# Altium PCB 1PR.PcbDoc
Units mil, origin at the board's own origin, x right, y up, seen from the top; angles counter-clockwise.
Board outline 6000 x 4000 mil, 2 copper layers (Top Layer, Bottom Layer); 24 components, 26 nets, 98 pads, 0 vias.
Unrouted connection lines stored in the file: 62.
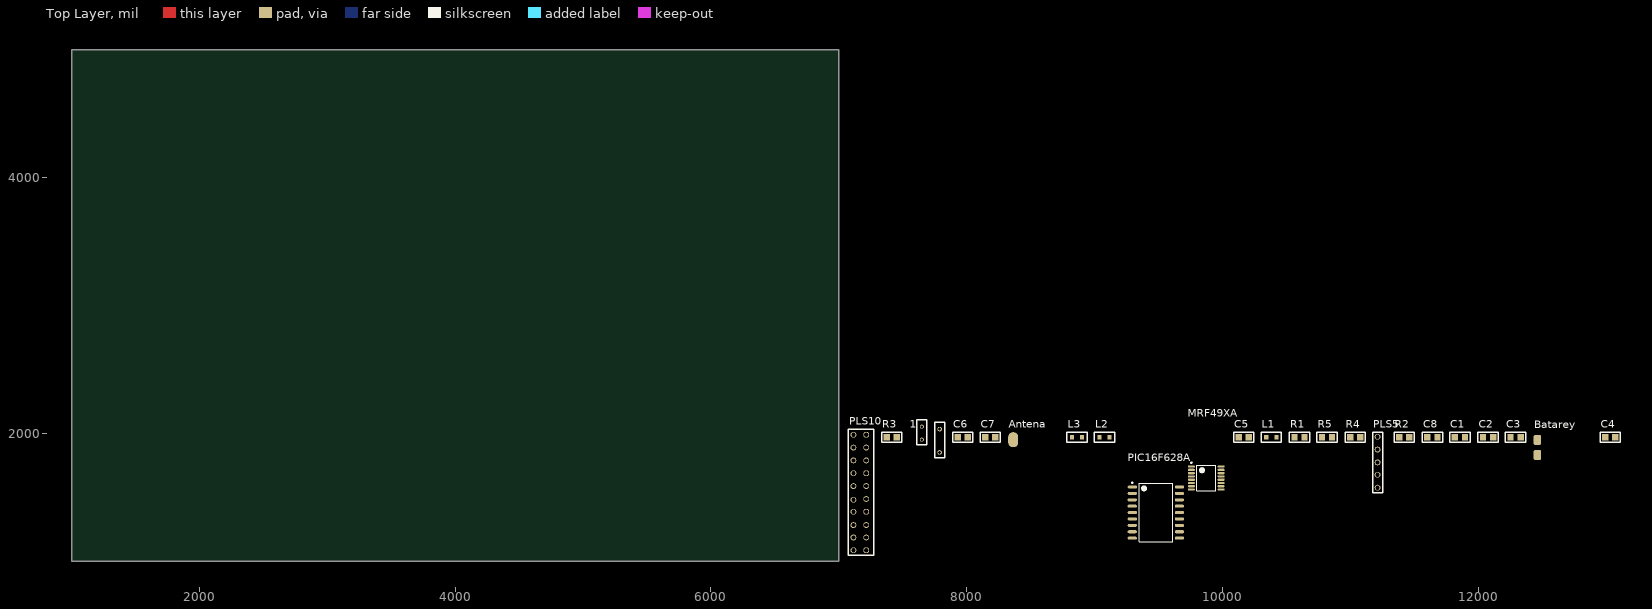
[diagram p0: Top Layer view]
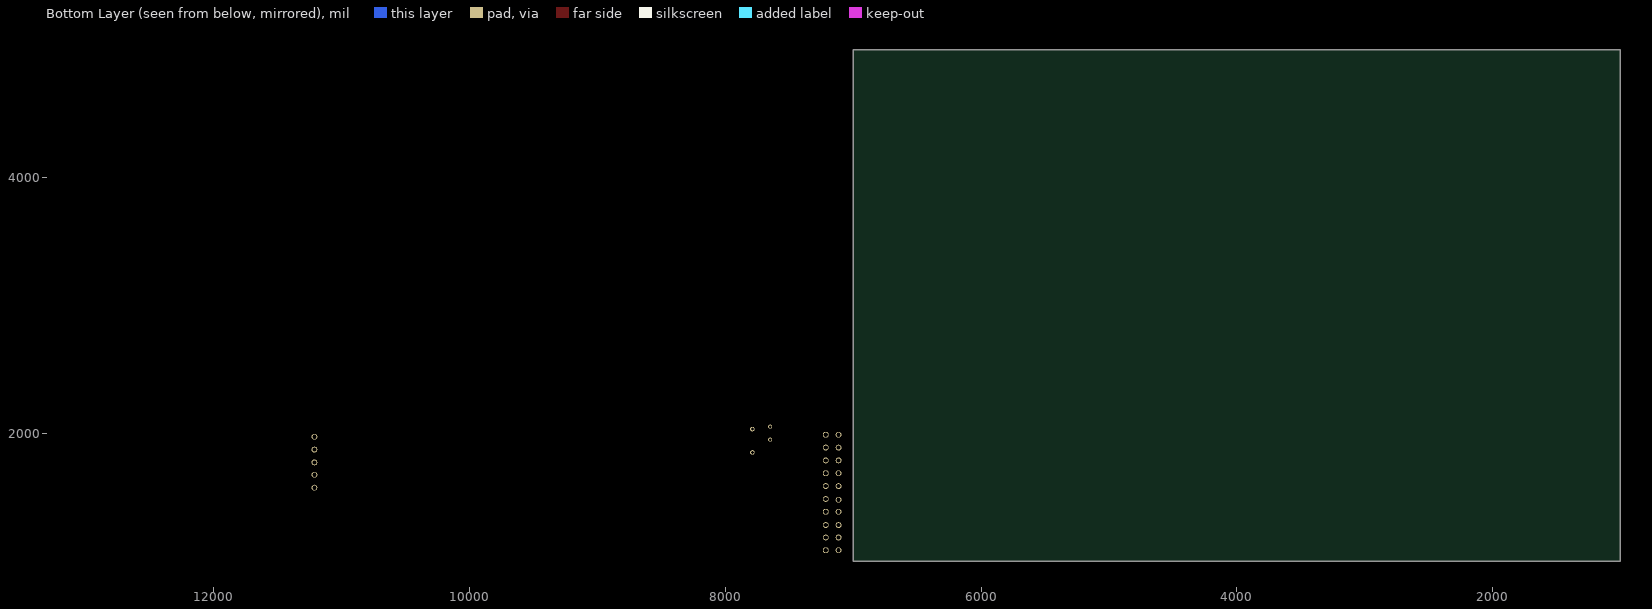
[diagram p1: Bottom Layer view, seen from below]

## Layer stack, top to bottom
Top Solder: solder mask 0.4, Solder Resist, Dk 3.5
Top Layer: signal copper 1.4
Dielectric 1: dielectric 12.6, FR-4, Dk 4.8
Bottom Layer: signal copper 1.4
Bottom Solder: solder mask 0.4, Solder Resist, Dk 3.5

## Board outline
1000,1000 7000,1000 7000,5000 1000,5000

## Design rules (kind name [scope] priority, off if disabled: settings)
Clearance [All] p1: gap=10
PolygonConnect [All] p1: connectstyle=Relief reliefconductorwidth=10 reliefentries=4 polygonreliefangle="90 Angle" airgapwidth=10
RoutingVias [All] p1: holewidth=28 width=50 viastyle="Through Hole" minholewidth=28 minwidth=50 maxholewidth=28 maxwidth=50
SolderMaskExpansion [All] p1: expansion=4
Width [All] p1: maxlimit=10 minlimit=10 preferedwidth=10
30 further rules are at their usual default settings.

## Components (designator, comment, footprint, x,y, rotation, side; value= is the part's Value field where it differs from the comment)
1 "" "Light-emitting diode" 7649.06,1950 r90 top
Antena "Antena" Anteny 8364.06,1950 r90 top (schematic designator Antena?)
Batarey "Batarey" Batarey 12464.06,1830 r90 top (schematic designator Batarey?)
C1 "" Ñ0805 11819.06,1970 r0 top
C2 "" Ñ0805 12039.06,1970 r0 top
C3 "" Ñ0805 12254.06,1970 r0 top
C4 "" Ñ0805 12994.06,1970 r0 top
C5 "" Ñ0805 10129.06,1970 r0 top
C6 "" Ñ0805 7929.06,1970 r0 top
C7 "" Ñ0805 8144.06,1970 r0 top
C8 "" Ñ0805 11604.06,1970 r0 top
L1 "" L? 10344.06,1970 r0 top
L2 "" L? 9039.06,1970 r0 top
L3 "" L? 8824.06,1970 r0 top
MRF49XA "MRF49XA" MRF49XA 9874.06,1650 r0 top (schematic designator MRF?)
PIC16F628A "PIC16F627A" PIC16F627A 9480,1380 r0 top (schematic designator PIC?)
PLS5 "PLS5" PLS5 11214.06,1575 r90 top (schematic designator *?)
PLS10 "PLS10" PLS10 7114.06,1085 r90 top (schematic designator *)
R1 "" R0805 10564.06,1970 r0 top
R2 "" R0805 11384.06,1970 r0 top
R3 "" R0805 7374.06,1970 r0 top
R4 "" R0805 10999.06,1970 r0 top
R5 "" R0805 10779.06,1970 r0 top
? "Y1" Quartz 7789.06,1850 r90 top

## Footprints (in the part's own frame and the unit in brackets; to place one, negate y for a bottom-side part, rotate by r counter-clockwise, add the part's x,y. Pads: shape width x height; smd on the part's side, far side on the other; paste and mask are expansions set on the pad)
Anteny [mm]
  oval 3x2 smd: 1(0,0)
Batarey [mm]
  rrect50% 2x1.524 smd: 1(0,0) 2(3,0)
L? [mm]
  rect 0.85x0.85 smd: 1(0,0) 2(2,0)
  silkscreen extent -1,-1 3,1
"Light-emitting diode" [mm]
  round 0.8 hole 0.5: 1(0,0) 2(2.6,0)
  silkscreen extent -1,-1 4,1
MRF49XA [mm]
  oval 1.4x0.45 smd: 1(-2.95,2.275) 2(-2.95,1.625) 3(-2.95,0.975) 4(-2.95,0.325) 5(-2.95,-0.325) 6(-2.95,-0.975) 7(-2.95,-1.625) 8(-2.95,-2.275) 9(2.95,-2.275) 10(2.95,-1.625) 11(2.95,-0.975) 12(2.95,-0.325) 13(2.95,0.325) 14(2.95,0.975) 15(2.95,1.625) 16(2.95,2.275)
  silkscreen extent -3.07,-2.55 1.85,3.17, body extent -2.25,-2.55 2.25,2.55, height 1.2
PIC16F627A [mm]
  oval 1.85x0.6 smd: 1(-4.675,5.08) 2(-4.675,3.81) 3(-4.675,2.54) 4(-4.675,1.27) 5(-4.675,0) 6(-4.675,-1.27) 7(-4.675,-2.54) 8(-4.675,-3.81) 9(-4.675,-5.08) 10(4.675,-5.08) 11(4.675,-3.81) 12(4.675,-2.54) 13(4.675,-1.27) 14(4.675,0) 15(4.675,1.27) 16(4.675,2.54) 17(4.675,3.81) 18(4.675,5.08)
  silkscreen extent -4.8,-5.8 3.35,6.05, body extent -3.75,-5.8 3.75,5.8, height 2.05
PLS5 [mm]
  round 1.15 hole 0.85: 1(0,0) 2(2.55,0) 3(5.01,0) 4(7.56,0) 5(10.11,0)
  silkscreen extent -1,-1 11,1
PLS10 [mm]
  round 1.15 hole 0.85: 1(0,0) 2(2.55,0) 3(5.01,0) 4(7.65,0) 5(10.02,0) 6(12.75,0) 7(15.3,0) 8(17.85,0) 9(20.4,0) 10(22.95,0) 11(0,-2.55) 12(2.55,-2.55) 13(5.01,-2.55) 14(7.65,-2.55) 15(10.2,-2.55) 16(12.75,-2.55) 17(15.3,-2.55) 18(17.85,-2.55) 19(20.4,-2.55) 20(22.95,-2.55)
  silkscreen extent -1,-4 24,1
Quartz [mm]
  round 0.9 hole 0.6: 1(0,0) 2(4.65,0)
  silkscreen extent -1,-1 6,1
R0805 [mm]
  rect 1.27x1.27 smd: 1(0,0) 2(2,0)
  silkscreen extent -1,-1 3,1
Ñ0805 [mm]
  rect 1.27x1.27 smd: 1(0,0) 2(2,0)
  silkscreen extent -1,-1 3,1

## Part data
1: library part "Light-emitting diode"
C1 C2 C3 C4 C5 C6 C7 C8: library part Capacity
L1 L2 L3: library part Inductance
R1 R2 R3 R4 R5: library part Rezistor
?: library part Quartz

## Nets (pads, with @x,y where several pads share a name; then routed paths per layer and width w, separated by ;. In a path a pad name is that pad's centre, name@x,y a point inside that pad or via, vN(x,y) a via of type N, cw(c..) or ccw(c..) an arc to the next point about the centre after c; other vN are vias at no path point)
CS: MRF49XA.3 PIC16F628A.17
FSK/DATA/FSEL: MRF49XA.6 PIC16F628A.18
"MCLR VPP": C8.1 R4.1
Net1_1: 1.1 R3.2
Net1_2: 1.2 PIC16F628A.16
Net*?_1: PLS5.1 R4.2
Net*?_2: PLS5.2 R5.2
Net*_10: PIC16F628A.15 PLS10.10 R2.1
Net_2: ?.2 MRF49XA.9
NetAntena?_1: Antena.1 C7.2
NetC5_1: C5.1 L1.2 L2.1 L3.1 MRF49XA.13
NetC6_1: C6.1 L2.2 MRF49XA.12
NetC6_2: C6.2 C7.1 L3.2
NETLABEL87: PIC16F628A.4 PLS10.1 R1.1
RB0/INT: PIC16F628A.6 PLS10.2
RB1/RX/DT: PIC16F628A.7 PLS10.3
RB2/TC/CK: PIC16F628A.8
RB3/CCP1: PIC16F628A.9 PLS10.5
RB4/PGM: PIC16F628A.10 PLS10.6
RB5: PIC16F628A.11 PLS10.7
RB6/T1OSO/T1CKI/PGC: PIC16F628A.12 PLS5.5 PLS10.8
RB7/T1OSI/PGD: PIC16F628A.13 PLS5.4 PLS10.9
SCK: MRF49XA.2 PIC16F628A.2
SDI: MRF49XA.1 PIC16F628A.1
VDD: C1.2 C2.2 C3.2 C4.2 C5.2 L1.1 MRF49XA.14 PIC16F628A.14 R1.2 R2.2 R5.1
VSS: ?.1 Batarey.1 C1.1 C2.1 C3.1 C4.1 C8.2 MRF49XA.11 PIC16F628A.5 PLS5.3 PLS10.11 PLS10.12 PLS10.13 PLS10.14 PLS10.15 PLS10.16 PLS10.17 PLS10.18 PLS10.19 PLS10.20 R3.1
pads on no net: Batarey.2 MRF49XA.4 MRF49XA.5 MRF49XA.7 MRF49XA.8 MRF49XA.10 MRF49XA.15 MRF49XA.16 PIC16F628A.3 PLS10.4